# EAGLE board FINAL Split Board RFB (EAGLE 9.7.0)
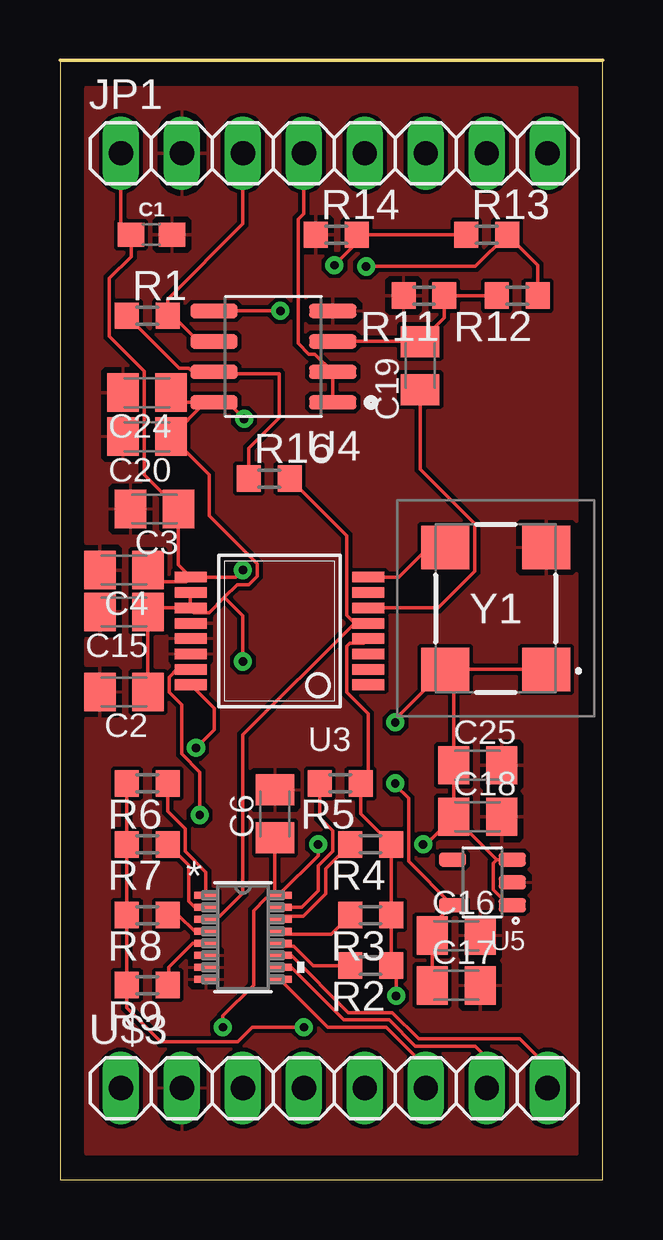
[diagram p0: board, top side]
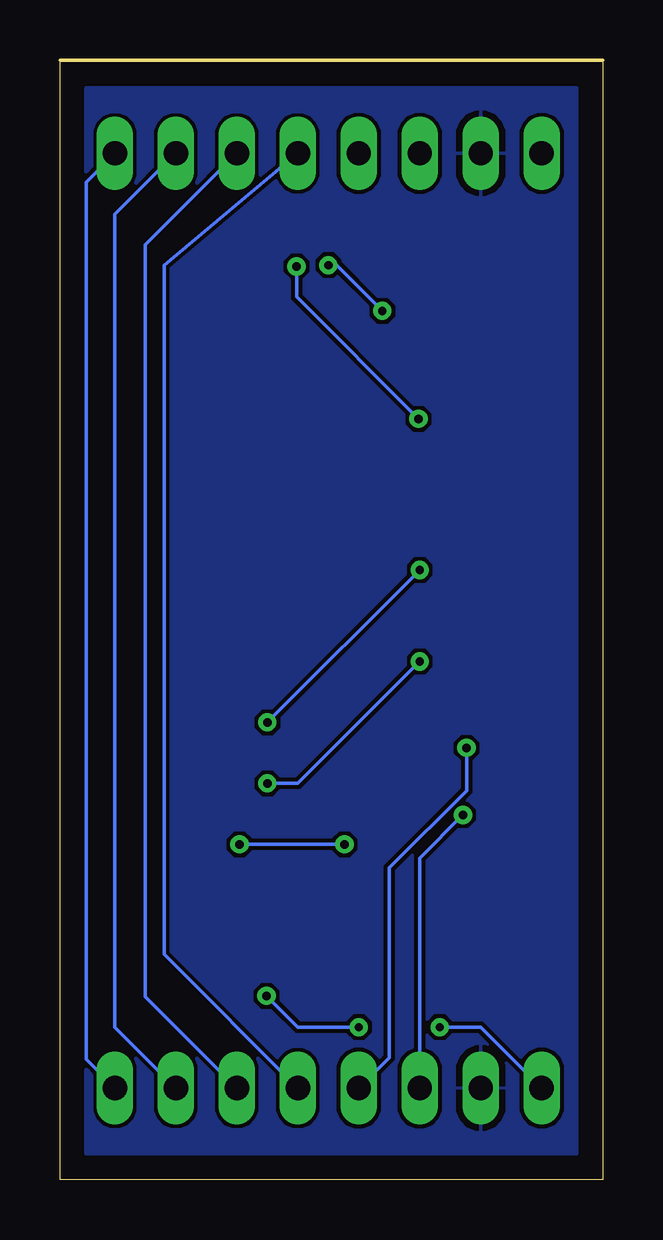
[diagram p1: board, bottom side, seen from below]

Size 22.61 x 46.65 mm. Coordinates in mm from the lower left corner, seen from the top.
Outline: 0,0 22.61,0 22.61,46.65 0,46.65 0,0
Copper layers (1*16): Top / Bottom
Stack-up Default Layer Stack: Top SilkScreen Epoxy Ink / Top SolderMask SR:Green 0.0254mm Dk 4.3 / Top Surface Finish Lead-Free 0.02mm / Top CuFoil:007 0.035mm / Dielectric-1 User Defined 1.5mm / Bottom CuFoil:007 0.035mm / Bottom Surface Finish Lead-Free 0.02mm / Bottom SolderMask SR:Green 0.0254mm Dk 4.3 / Bottom SilkScreen Epoxy Ink
Design rules: minimum drill size 0.35mm, minimum copper width 6mil, keepout clearance 0mil, drill distance 6mil, via restrict clearance 0mil, dimension clearance 40mil, restrict clearance 0mil, copper clearance wire_polygon to wire_polygon 6mil, copper clearance wire_polygon to pad_smd 6mil, copper clearance wire_polygon to via 6mil, copper clearance pad_smd to pad_smd 6mil, copper clearance pad_smd to via 6mil, copper clearance via to via 6mil, copper clearance smd to pad (same net) 6mil, copper clearance smd to via (same net) 6mil, copper clearance smd to smd (same net) 6mil

## Footprints (pad centres in the part's own frame; a part is rotated, then mirrored left to right if it is on the bottom)
0603 = smd 1.1 x 1: 1 -0.85,0; 2 0.85,0
C0805K = smd 1.3 x 1.6: 1 -1,0; 2 1,0
1X08 = drill 1.016 long: 1 -8.89,0; 2 -6.35,0; 3 -3.81,0; 4 -1.27,0; 5 1.27,0; 6 3.81,0; 7 6.35,0; 8 8.89,0
R0603 = smd 1 x 1.1: 1 -0.85,0; 2 0.85,0
SOT-23-THIN16_DYY_TEX = smd 0.978 x 0.305: 1 -1.543,1.75; 2 -1.543,1.25; 3 -1.543,0.75; 4 -1.543,0.25; 5 -1.543,-0.25; 6 -1.543,-0.75; 7 -1.543,-1.25; 8 -1.543,-1.75; 9 1.543,-1.75; 10 1.543,-1.25; 11 1.543,-0.75; 12 1.543,-0.25; 13 1.543,0.25; 14 1.543,0.75; 15 1.543,1.25; 16 1.543,1.75
SSOP16 = smd 0.44 x 1.34: 1 -2.24,-3.7; 2 -1.6,-3.7; 3 -0.96,-3.7; 4 -0.32,-3.7; 5 0.32,-3.7; 6 0.96,-3.7; 7 1.6,-3.7; 8 2.24,-3.7; 9 2.24,3.7; 10 1.6,3.7; 11 0.96,3.7; 12 0.32,3.7; 13 -0.32,3.7; 14 -0.96,3.7; 15 -1.6,3.7; 16 -2.24,3.7
SOIC-8 = smd 1.97 x 0.6: 1 -2.475,1.905; 2 -2.475,0.635; 3 -2.475,-0.635; 4 -2.475,-1.905; 5 2.475,-1.905; 6 2.475,-0.635; 7 2.475,0.635; 8 2.475,1.905
SOT95P280X100-5N = smd 1.14 x 0.59: 1 -1.245,0.95; 2 -1.245,0; 3 -1.245,-0.95; 4 1.245,-0.95; 5 1.245,0.95
XO57CRECNA16M = smd 2 x 1.8: 1 2.1,-2.54; 2 2.1,2.54; 3 -2.1,2.54; 4 -2.1,-2.54

## Placement (x,y rotation side)
C1  0.1uF  [0603]  3.81,39.37 0 top
C2  0.1uF  [C0805K]  2.67,20.32 180 top
C3  10uF  [C0805K]  3.94,27.94 180 top
C4  0.1uF  [C0805K]  2.67,25.4 180 top
C6  0.1uF  [C0805K]  8.95,15.24 90 top
C15  10uF  [C0805K]  2.67,23.65 180 top
C16  10uF  [C0805K]  16.51,10.17 0 top
C17  0.1uF  [C0805K]  16.51,8.09 0 top
C18  0.1uF  [C0805K]  17.4,15.12 0 top
C19  47nF  [C0805K]  15.01,33.91 90 top
C20  10uF  [C0805K]  3.63,30.96 180 top
C24  0.1uF  [C0805K]  3.63,32.79 180 top
C25  10uF  [C0805K]  17.4,17.26 0 top
JP1  [1X08]  11.43,42.76 0 top
R1  1K  [R0603]  3.64,35.99 0 top
R2  1K  [R0603]  12.94,8.92 180 top
R3  1K  [R0603]  12.94,11.02 180 top
R4  1K  [R0603]  12.94,13.97 180 top
R5  1K  [R0603]  11.67,16.51 180 top
R6  1K  [R0603]  3.64,16.51 180 top
R7  1K  [R0603]  3.64,13.97 180 top
R8  1K  [R0603]  3.64,11.02 180 top
R9  1K  [R0603]  3.64,8.11 180 top
R11  49.9K  [R0603]  15.16,36.83 180 top
R12  49.9K  [R0603]  19.05,36.83 180 top
R13  49.9K  [R0603]  17.78,39.37 0 top
R14  49.9K  [R0603]  11.51,39.37 0 top
R16  20K  [R0603]  8.72,29.21 0 top
U1  PTMUX4051DYYRSOT-23-THIN16_DYY_TEX  [SOT-23-THIN16_DYY_TEX]  7.62,10.09 0 top
U3  AD5933  [SSOP16]  9.15,22.86 90 top
U4  AD8606  [SOIC-8]  8.89,34.29 180 top
U5  ADP150  [SOT95P280X100-5N]  17.6,12.38 180 top
U$3  PINHD-1X08_1X08M  [1X08]  11.43,3.81 0 top
Y1  XO57CRECNA16M  [XO57CRECNA16M]  18.15,23.8 0 top

## Library data of the parts
C1 = SparkFun-Capacitors; PROD_ID: CAP-00810
C2-C4 C6 C15-C20 C24 C25 = rcl; SPICEPREFIX: C
JP1 = pinhead
R1-R9 R11-R14 R16 = rcl; SPICEPREFIX: R
U1 = 2025-11-25_04-52-31_Library; COPYRIGHT: Copyright (C) 2025 Ultra Librarian. All rights reserved.; DESCRIPTION: ±12-V, 8:1, one-channel multiplexer with 1.8-V compatible logic 16-SOT-23-THIN -55 to 125; MANUFACTURER_NAME: Texas Instruments; MANUFACTURER_PART_NUMBER: PTMUX4051DYYR
U3 = PMODIA
U4 = Updated PMODIA; AVAILABILITY: In Stock; CHECK_PRICES: https://www.snapeda.com/parts/AD8606ARZ/Analog+Devices/view-part/?ref=eda; DESCRIPTION: Precision, Low Noise, RRIO, CMOS Op Amp (Dual); MF: Analog Devices; MP: AD8606ARZ; PACKAGE: SOIC-8 Analog Devices; PRICE: None; PURCHASE-URL: https://www.snapeda.com/api/url_track_click_mouser/?unipart_id=43414&manufacturer=Analog Devices&part_name=AD8606ARZ&search_term=ad8606; SNAPEDA_LINK: https://www.snapeda.com/parts/AD8606ARZ/Analog+Devices/view-part/?ref=snap
U5 = Updated PMODIA; AVAILABILITY: In Stock; CHECK_PRICES: https://www.snapeda.com/parts/ADP150AUJZ-2.0-R7/Analog+Devices/view-part/?ref=eda; DESCRIPTION: Ultralow Noise, 150 mA CMOS Linear Regulator; MF: Analog Devices; MP: ADP150AUJZ-2.0-R7; PACKAGE: TSOT-5 Analog Devices; PRICE: None; PURCHASE-URL: https://www.snapeda.com/api/url_track_click_mouser/?unipart_id=1225884&manufacturer=Analog Devices&part_name=ADP150AUJZ-2.0-R7&search_term=adp150; SNAPEDA_LINK: https://www.snapeda.com/parts/ADP150AUJZ-2.0-R7/Analog+Devices/view-part/?ref=snap
U$3 = Tinkercad
Y1 = XO57CRECNA16M; DESCRIPTION: Standard Clock Oscillators 16MHz; HEIGHT: 1.9mm; MANUFACTURER_NAME: Vishay; MANUFACTURER_PART_NUMBER: XO57CRECNA16M; MOUSER_PART_NUMBER: 73-XOSM57BRE16MHZ; MOUSER_PRICE-STOCK: https://www.mouser.co.uk/ProductDetail/Vishay-Dale/XO57CRECNA16M?qs=VsPLLCyI2ZLtoU%252BQ7ye5Yg%3D%3D

## Nets
GND: C1.2 C2.2 C3.2 C4.2 C6.2 C15.2 C16.2 C17.2 C18.2 C20.2 C24.2 C25.2 JP1.2 R11.2 R14.1 U1.6 U1.7 U1.8 U3.12 U3.13 U3.14 U4.4 U5.2 U$3.2 Y1.2
INBP: R13.1 R14.2 U4.5
N$1: C19.1 U3.6
N$2: R2.2 U1.12
N$3: C19.2 R11.1 R12.2 U4.3
N$5: R2.1 R3.1 R4.1 R5.1 R6.2 R7.2 R8.2 R9.2 U3.4
N$6: R3.2 U1.13
N$7: R4.2 U1.14
N$8: R5.2 U1.15
N$9: R6.1 U1.1
N$10: R7.1 U1.2
N$11: R1.1 R16.1 U4.7
N$12: R8.1 U1.4
N$13: R9.1 U1.5
N$14: U3.8 Y1.3
S0: JP1.8 U1.11 U$3.8
S1: JP1.7 U1.10 U$3.7
S2: JP1.6 U1.9 U$3.6
S3: JP1.5 U$3.5
SCL: U3.16 U$3.4
SDA: U3.15 U$3.3
VCC: C1.1 C3.1 C4.1 C6.1 C18.1 C25.1 JP1.1 U1.16 U3.9 U5.1 U5.3 U$3.1 Y1.1 Y1.4
VCC3V0: C2.1 C15.1 C16.1 C17.1 C20.1 C24.1 R12.1 R13.2 U3.10 U3.11 U4.8 U5.5
VIN: R16.2 U1.3 U3.5
Z: JP1.4 U4.1 U4.2
Z2: JP1.3 R1.2 U4.6

## Tracks (layer width: path | path; a pad name or v marks a point on that pad's centre or on a via)
GND
  pour Top: -2.54,48.26 25.4,48.26 25.4,-1.27 -2.54,-1.27
  pour Bottom: -3.81,48.26 -3.81,-5.08 26.67,-5.08 26.67,48.26
INBP  (via drill 0.35)
  Top 0.152: R13.1 12.7,39.37 | 12.7,39.37 R14.2 | v9.18,36.2 U4.5 | v11.43,38.1 12.7,39.37
  Bottom 0.152: v9.18,36.2 11.09,38.1 v11.43,38.1
N$1
  Top 0.152: U3.6 15.76,23.82 17.28,25.34 17.28,27.33 15.01,29.61 C19.1
N$2
  Top 0.152: U1.12 9.28,9.73 9.75,9.73 10.55,8.92 R2.2
N$3
  Top 0.152: U4.3 15,34.93 C19.2 16.01,35.92 R11.1 R12.2
N$5  (via drill 0.35)
  Top 0.152: R6.2 R7.2 R8.2 R9.2 2.79,7.16 4.21,5.74 7.41,5.74 8.02,6.35 v10.16,6.35 | U3.4 12.66,22.35 12.08,22.35 11.95,22.21 11.95,20.3 12.85,19.41 12.85,16.84 R5.1 12.52,15.24 R4.1 R3.1 R2.1 14.01,8.71 v14.01,7.66
  Bottom 0.152: v10.16,6.35 12.7,6.35 v14.01,7.66
N$6
  Top 0.152: U1.13 9.28,10.23 11.3,10.23 R3.2
N$7
  Top 0.152: R4.2 11.07,12.95 11.07,11.91 10.12,10.96 9.28,10.96 U1.14
N$8
  Top 0.152: U1.15 10.07,11.34 10.77,12.04 10.77,13.07 11.36,13.67 11.36,14.53 10.82,15.07 R5.2
N$9
  Top 0.152: R6.1 4.49,15.34 5.21,14.62 5.21,13.67 6.08,12.81 U1.1
N$10
  Top 0.152: R7.1 5.36,13.1 5.36,11.6 5.61,11.34 U1.2
N$11
  Top 0.152: R1.1 4.96,33.82 5.37,33.82 5.53,33.66 U4.7 6.5,33.57 9.14,33.57 9.14,31.75 7.87,30.48 R16.1
N$12
  Top 0.152: R8.1 4.94,11.02 5.61,10.34 U1.4
N$13
  Top 0.152: U1.5 6,9.84 6,9.85 5.54,9.85 4.53,8.84 4.53,8.15 R9.1
N$14
  Top 0.152: U3.8 14.12,25.1 15.36,26.34 Y1.3
S0
  Top 0.152: U$3.8 20.32,4.7 19.16,5.87 14.94,5.87 13.85,6.96 12.01,6.96 9.63,9.34 U1.11
  Bottom 0.152: JP1.8 21.52,41.57 21.52,5.01 U$3.8
S1
  Top 0.152: U$3.7 17.78,5.08 17.3,5.56 14.81,5.56 13.72,6.65 11.82,6.65 9.63,8.84 U1.10
  Bottom 0.152: U$3.7 20.32,6.35 20.32,40.22 JP1.7
S2
  Top 0.152: U1.9 11.16,6.35 13.59,6.35 15.24,4.7 U$3.6
  Bottom 0.152: JP1.6 19.05,38.95 19.05,7.62 U$3.6
S3
  Bottom 0.152: U$3.5 18.27,9.38 18.27,38.1 JP1.5
SCL  (via drill 0.35)
  Top 0.152: U3.16 6.43,19.64 6.43,18.75 v5.67,17.99
  Bottom 0.152: U$3.4 8.89,5.08 8.89,12.98 5.67,16.2 v5.67,17.99
SDA  (via drill 0.35)
  Top 0.152: v5.82,15.19 5.82,16.98 5.06,17.74 5.06,19.79 4.55,20.3 4.55,20.93 4.87,21.26 U3.15
  Bottom 0.152: v5.82,15.19 7.62,13.39 U$3.3
VCC  (via drill 0.35)
  Top 0.152: U3.9 4.94,25.61 C3.1 3.51,29.37 3.51,33.68 2.06,35.13 2.06,37.56 2.96,38.46 C1.1 2.54,39.79 JP1.1 | U3.9 5.26,24.91 4.16,24.91 C4.1 | C18.1 C25.1 16.4,20.91 Y1.4 | C18.1 18.19,13.33 | 18.19,13.33 U5.3 | U5.1 18.69,11.43 18.04,12.08 18.04,13.18 18.19,13.33 | C6.1 8.95,12.05 U1.16 | C18.1 15.25,13.97 v15.13,13.97 | U1.16 9.04,11.73 8.58,11.73 8.06,11.21 8.06,8.1 6.79,6.82 v6.79,6.35 | v7.62,25.4 7.32,25.1 U3.9 | U1.16 9.16,11.9 10.76,13.5 v10.76,13.97 | v13.97,19.05 13.97,19.17 Y1.4 | Y1.1 Y1.4
  Bottom 0.152: U$3.1 5.08,6.35 v6.79,6.35 | v13.97,19.05 v7.62,25.4 | v15.13,13.97 v10.76,13.97
VCC3V0  (via drill 0.35)
  Top 0.152: R12.1 19.9,38.1 R13.2 17.31,38.05 v12.75,38.05 | C24.1 5.03,32.38 6.06,32.38 | 6.06,32.38 C20.1 6.21,29.37 6.21,27.67 8.23,25.65 8.23,25.15 7.87,24.79 7.38,24.79 6.85,24.26 | 6.06,32.38 U4.8 6.99,32.38 v7.67,31.7 | U3.10 5.42,24.43 5.42,23.79 | 5.42,23.79 U3.11 3.84,23.82 C15.1 C2.1 | v13.97,16.51 13.97,16.44 14.52,15.88 14.52,13.26 U5.5 15.51,10.59 C16.1 C17.1 | 5.42,23.79 5.58,23.63 6.21,23.63 6.85,24.26 | v7.62,21.59 7.62,23.49 6.85,24.26
  Bottom 0.152: v12.75,38.05 12.75,36.78 v7.67,31.7 | v13.97,16.51 12.7,16.51 v7.62,21.59
VIN
  Top 0.152: 12.27,23.18 7.62,18.53 7.62,11.92 6.66,10.96 6.2,10.96 U1.3 | R16.2 11.95,26.83 11.95,23.5 12.27,23.18 | 12.27,23.18 | 12.27,23.18 U3.5
Z
  Top 0.152: JP1.4 10.16,40.25 9.93,40.02 9.93,34.84 10.37,34.4 10.62,34.4 U4.2 U4.1
Z2
  Top 0.152: JP1.3 7.62,39.82 4.49,36.69 R1.2 4.7,35.99 5.77,34.93 6.24,34.93 | 6.24,34.93 U4.6 | 6.24,34.93